# EAGLE board ProMiniShield (EAGLE 7.1.0)
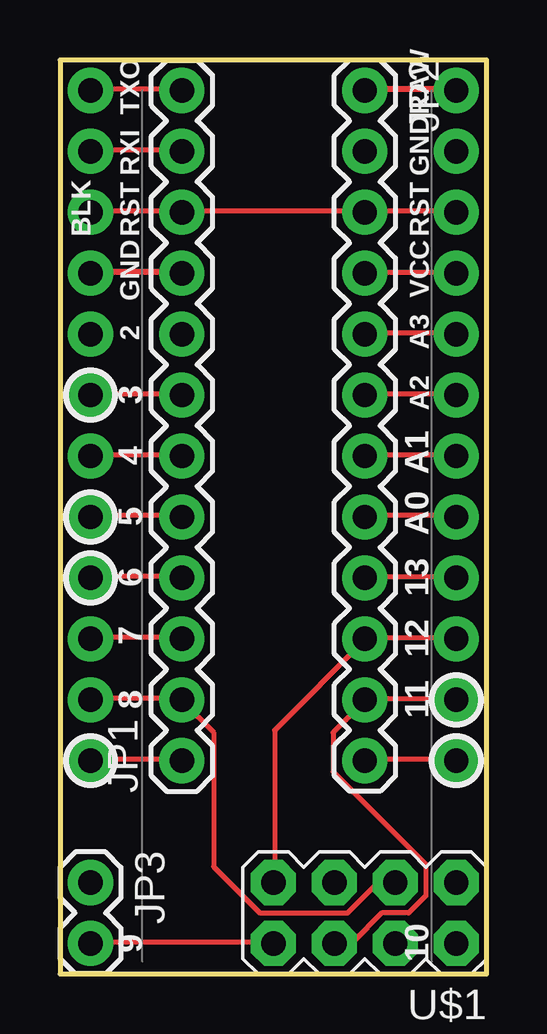
[diagram p0: board, top side]
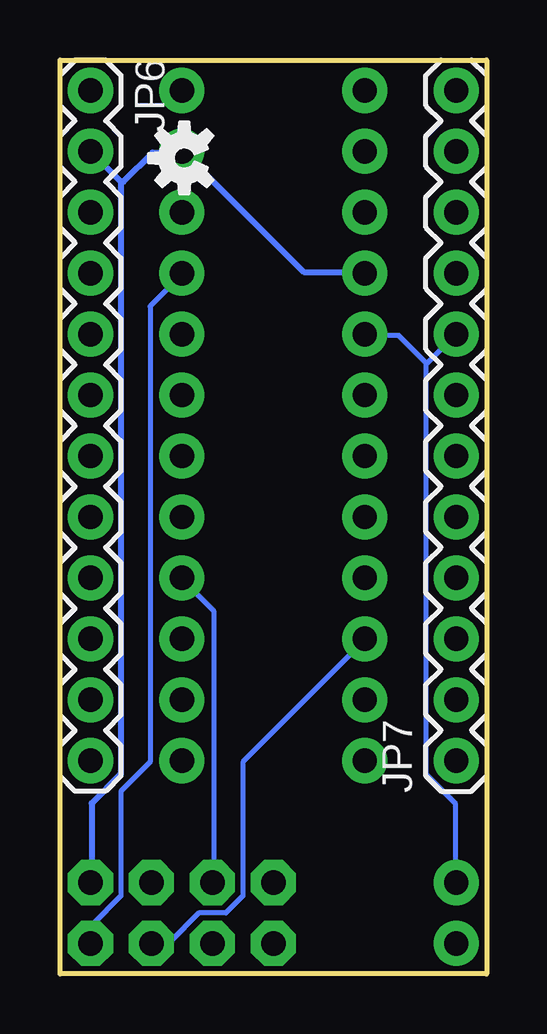
[diagram p1: board, bottom side, seen from below]

Size 17.78 x 38.1 mm. Coordinates in mm from the lower left corner, seen from the top.
Outline: 0,38.1 0,0 17.78,0 17.78,38.1 0,38.1
Copper layers (1*16): Top 0.035mm / dielectric 1.5mm / Bottom 0.035mm
Design rules "default": minimum track width 8mil, minimum drill 20mil, track to track 8mil, track to pad 8mil, pad to pad 8mil, via to via 8mil, smd to smd 8mil, copper to edge 8mil, drill to drill 8mil, minimum pad ring 12mil, minimum via ring 10mil, stop-mask expansion 4mil, vias tented up to drill 20mil, thermal gap 10mil
Net classes: 0 default: width 0.203 mm; 1 vcc: width 0.254 mm

## Footprints (pad centres in the part's own frame; a part is rotated, then mirrored left to right if it is on the bottom)
1X12 = drill 1.016 pad 1.88: 1 0,0; 2 2.54,0; 3 5.08,0; 4 7.62,0; 5 10.16,0; 6 12.7,0; 7 15.24,0; 8 17.78,0; 9 20.32,0; 10 22.86,0; 11 25.4,0; 12 27.94,0
1X02 = drill 1.016 pad 1.88: 1 0,0; 2 2.54,0
2X4 = drill 1.016 pad 1.88 octagon: 1 -3.81,-1.27; 2 -3.81,1.27; 3 -1.27,-1.27; 4 -1.27,1.27; 5 1.27,-1.27; 6 1.27,1.27; 7 3.81,-1.27; 8 3.81,1.27

## Placement (x,y rotation side)
JP1  [1X12]  5.08,8.89 90 top
JP2  [1X12]  12.7,36.83 270 top
JP3  M02PTH  [1X02]  1.27,3.81 270 top
JP6  [1X12]  16.51,36.83 270 bottom
JP7  [1X12]  1.27,8.89 90 bottom
U$1  M04X2  [2X4]  12.7,2.54 180 top
U$3  OSHW-LOGOS  [OSHW-LOGO-S]  12.6,34.01 90 bottom

## Library data of the parts
JP1 JP2 JP6 JP7 U$3 = SparkFun
JP3 U$1 = SparkFun-Connectors

## Nets
A0: JP2.8 JP6.8
A1: JP2.7 JP6.7
A2: JP2.6 JP6.6
A3: JP2.5 JP6.5
CE_RADIO: JP1.2 JP7.2 U$1.3
CSN_RADIO: JP1.3 JP7.3 U$1.4
D2: JP1.8 JP3.1 JP7.8
D3: JP1.7 JP7.7
D4: JP1.6 JP7.6
D5: JP1.5 JP7.5
D6: JP1.4 JP7.4
D9: JP1.1 JP7.1
D10: JP2.12 JP6.12
GND [vcc]: JP1.9 JP2.2 JP6.2 JP7.9 U$1.1
INT_RADIO: JP3.2 U$1.8
MISO: JP2.10 JP6.10 U$1.7
MOSI: JP2.11 JP6.11 U$1.6
RAW [vcc]: JP2.1 JP6.1
RESET: JP1.10 JP2.3 JP6.3 JP7.10
RXI: JP1.11 JP7.11
SCK: JP2.9 JP6.9 U$1.5
TXO: JP1.12 JP7.12
VCC: JP2.4 JP6.4 U$1.2

## Tracks (layer width: path | path; a pad name or v marks a point on that pad's centre or on a via)
A0
  Top 0.203: JP2.8 12.7,19.1 16.46,19.1 JP6.8
A1
  Top 0.203: JP2.7 12.7,21.64 16.46,21.64 JP6.7
A2
  Top 0.203: JP2.6 12.7,24.18 16.46,24.18 JP6.6
A3
  Top 0.203: JP2.5 12.7,26.72 16.46,26.72 JP6.5
CE_RADIO
  Top 0.203: JP7.2 1.32,11.48 5.08,11.48 JP1.2 5.08,11.38 6.4,10.06 6.4,4.47 8.33,2.54 11.99,2.54 13.21,3.76 13.92,3.76 U$1.3
CSN_RADIO
  Top 0.203: JP7.3 1.32,14.02 5.08,14.02 JP1.3
  Bottom 0.203: U$1.4 13.92,1.32 13.21,1.32 11.99,2.54 10.87,2.54 10.16,3.25 10.16,8.84 5.08,13.92 JP1.3
D2
  Bottom 0.203: JP7.8 2.49,25.45 | 2.49,25.45 2.54,25.4 2.54,8.33 1.32,7.11 1.32,3.86 JP3.1 | 2.49,25.45 3.66,26.62 5.08,26.62 JP1.8
D3
  Top 0.203: JP7.7 1.32,24.18 5.08,24.18 JP1.7
D4
  Top 0.203: JP7.6 1.32,21.64 5.08,21.64 JP1.6
D5
  Top 0.203: JP7.5 1.32,19.1 5.08,19.1 JP1.5
D6
  Top 0.203: JP7.4 1.32,16.56 5.08,16.56 JP1.4
D9
  Top 0.203: JP7.1 1.32,8.94 5.08,8.94 JP1.1
D10
  Top 0.203: JP2.12 12.7,8.94 16.46,8.94 JP6.12
GND
  Top 0.254: JP7.9 1.32,29.26 5.08,29.26 JP1.9
  Bottom 0.254: 15.24,33.02 15.24,8.33 16.46,7.11 16.46,3.86 U$1.1 | JP6.2 15.24,33.02 | 15.24,33.02 15.14,33.02 13.92,34.24 12.7,34.24 JP2.2 12.6,34.24 7.62,29.26 5.08,29.26 JP1.9
INT_RADIO
  Top 0.203: JP3.2 1.32,1.32 8.84,1.32 U$1.8
MISO
  Top 0.203: U$1.7 8.94,3.86 8.94,10.16 12.7,13.92 JP2.10 12.7,14.02 16.46,14.02 JP6.10
MOSI
  Top 0.203: U$1.6 11.48,1.32 12.19,1.32 13.41,2.54 14.53,2.54 15.24,3.25 15.24,4.57 11.38,8.43 11.38,10.06 12.7,11.38 JP2.11 12.7,11.48 16.46,11.48 JP6.11
RAW
  Top 0.254: JP2.1 12.7,36.88 16.46,36.88 JP6.1
RESET
  Top 0.203: 5.08,31.8 1.32,31.8 JP7.10 | 12.7,31.8 16.46,31.8 JP6.3 | 12.7,31.8 5.08,31.8 | 5.08,31.8 JP1.10 | 12.7,31.8 JP2.3
RXI
  Top 0.203: JP7.11 1.32,34.34 5.08,34.34 JP1.11
SCK
  Top 0.203: JP6.9 16.46,16.56 12.7,16.56 JP2.9
  Bottom 0.203: U$1.5 11.38,3.86 11.38,15.14 12.7,16.46 JP2.9
TXO
  Top 0.203: JP7.12 1.32,36.88 5.08,36.88 JP1.12
VCC
  Top 0.203: JP6.4 16.46,29.26 12.7,29.26 JP2.4
  Bottom 0.203: U$1.2 16.46,1.32 16.46,2.03 15.24,3.25 15.24,7.62 14.02,8.84 14.02,27.84 12.7,29.16 JP2.4

## Text on the board
tPlace: TXO | RAW | RXI | GND | BLK | RST | RST | GND | VCC | 2 | A3 | 3 | A2 | 4 | A1 | 5 | A0 | 6 | 13 | 7 | 12 | 8 | 11 | 9 | 10